# Altium PCB PCB_Left.pcbdoc
Units mil, origin at the board's own origin, x right, y up, seen from the top; angles counter-clockwise.
Board outline 5330 x 4850 mil, 2 copper layers (Top Layer, Bottom Layer), stack 62.206 mil thick; 7 components, 9 nets, 31 pads, 4 vias.
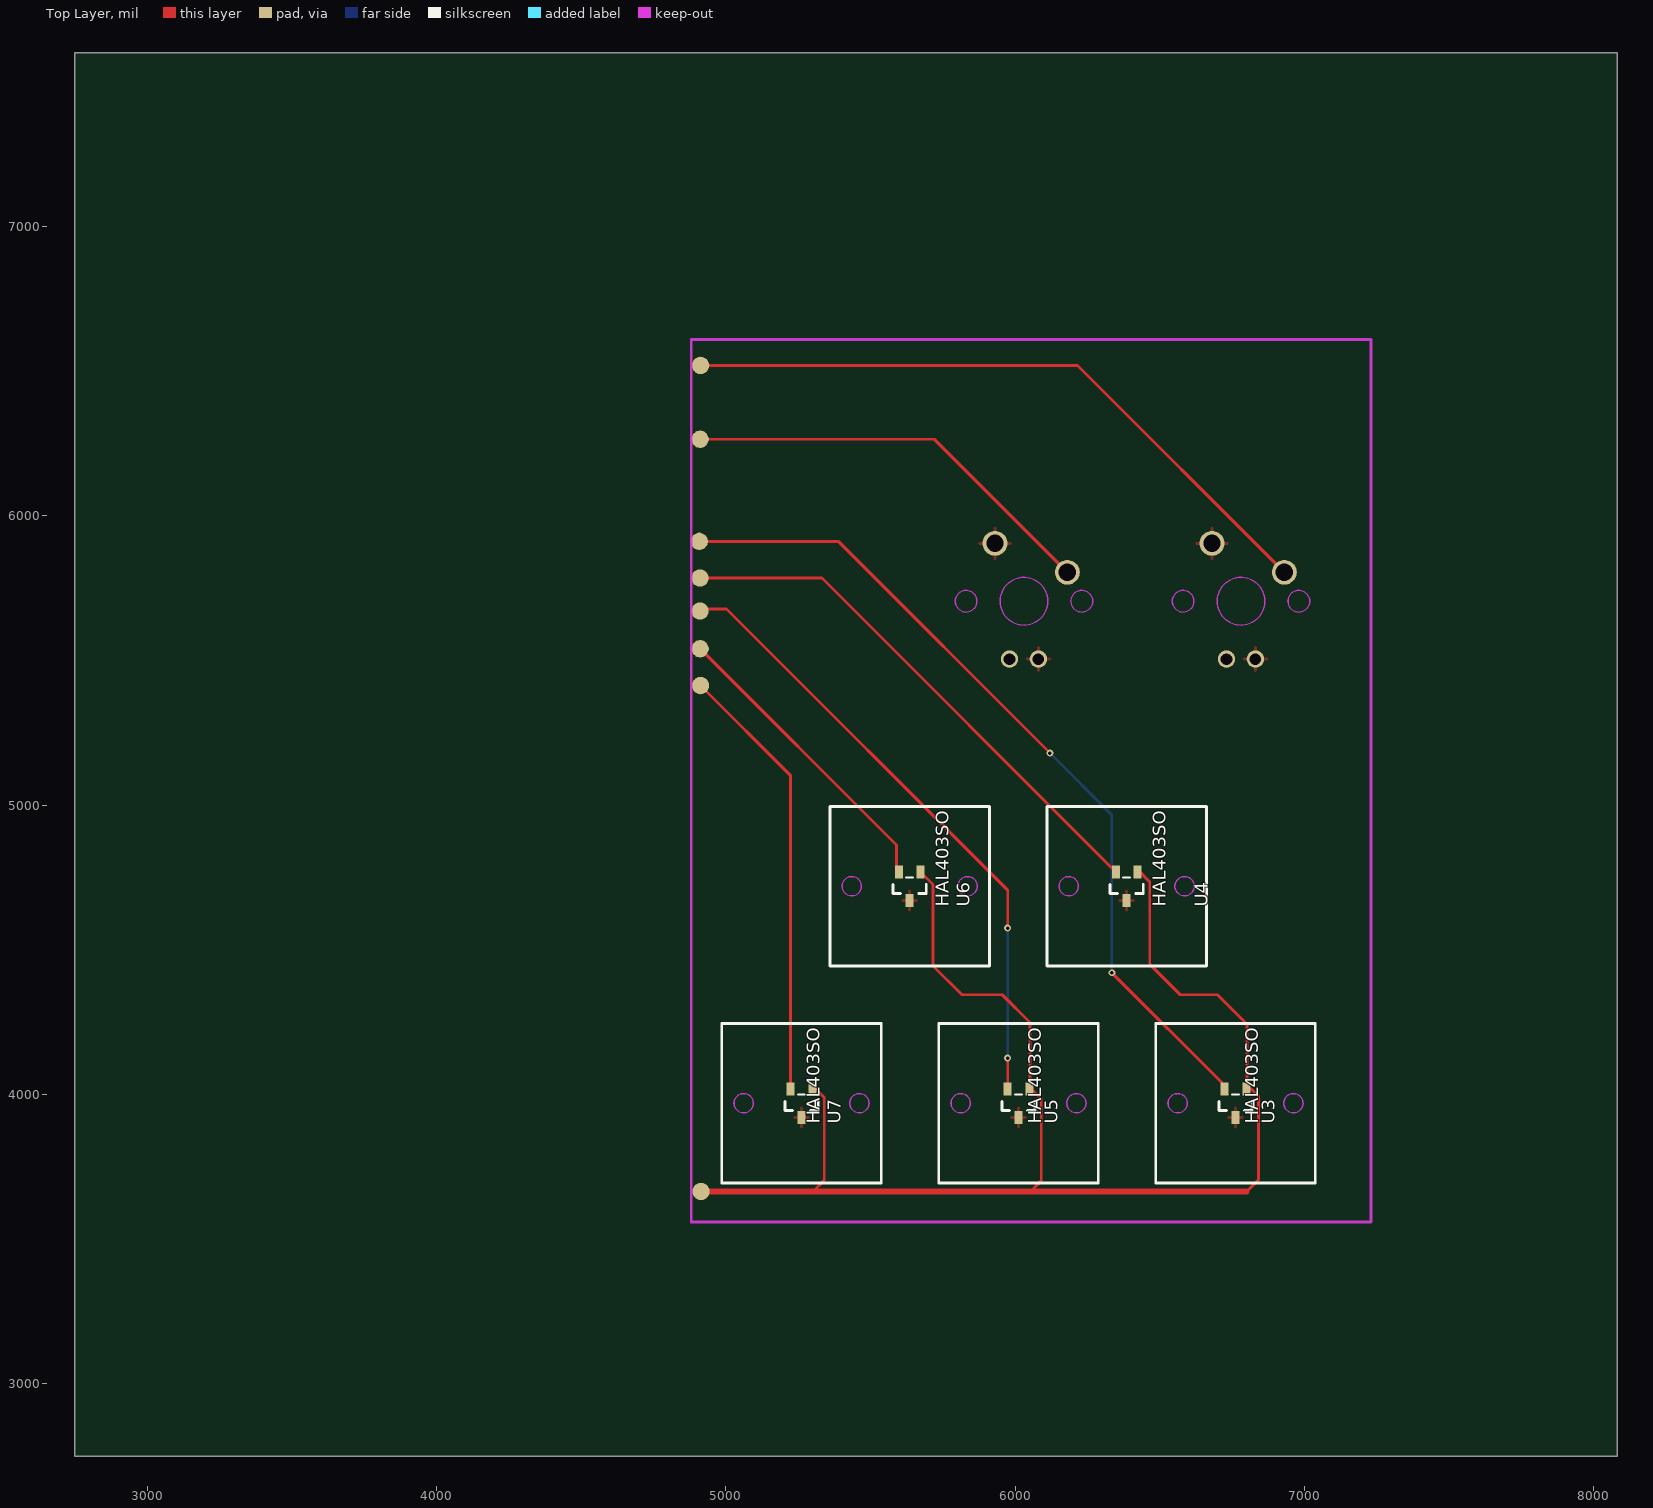
[diagram p0: Top Layer view]
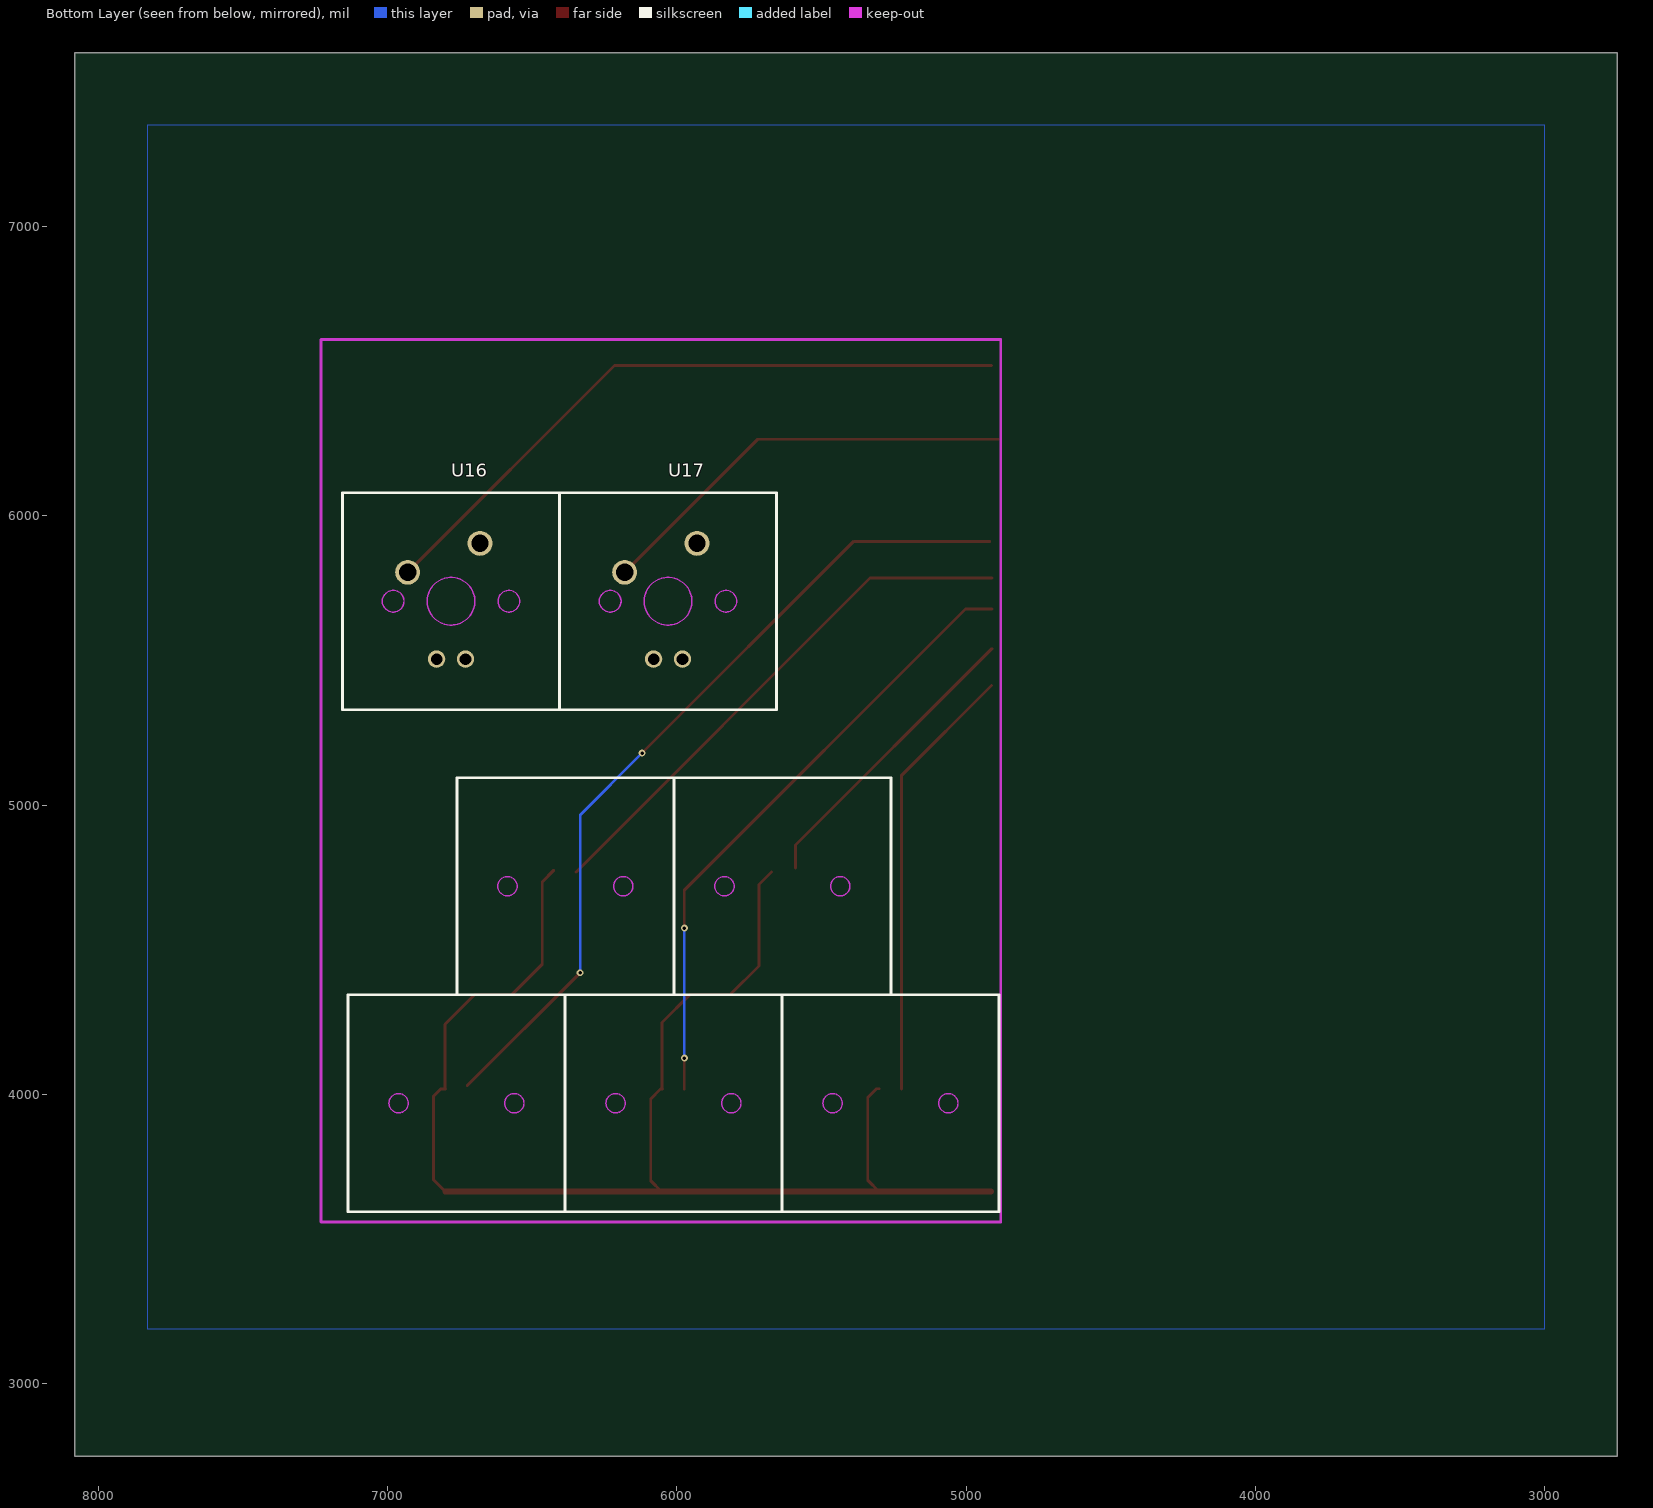
[diagram p1: Bottom Layer view, seen from below]

## Layer stack, top to bottom
Top Solder Mask Layer: solder mask 0.394, Dk 3.3
Top Layer: signal copper 1.379
Dielectric1: surface 59.449, FR4, Dk 4.5
Bottom Layer: signal copper 1.378
Bottom Solder Mask Layer: solder mask 0.394, Dk 3.3

## Board outline
8080,2750 2750,2750 2750,7600 8080,7600

## Design rules (kind name [scope] priority, off if disabled: settings)
BoardOutlineClearance copperThickness1oz [All] p0: genericclearance=10 ignorepadtopadclearanceinfootprint=FALSE except(0: Arc-SplitContinuation Track-SplitContinuation SMDPad-SplitContinuation THPad-SplitContinuation Via-SplitContinuation Fill-SplitContinuation Poly-SplitContinuation Region-SplitContinuation Text-SplitContinuation)
BoardOutlineClearance copperThickness2oz [All] p0: genericclearance=10 ignorepadtopadclearanceinfootprint=FALSE except(0: Arc-SplitContinuation Track-SplitContinuation SMDPad-SplitContinuation THPad-SplitContinuation Via-SplitContinuation Fill-SplitContinuation Poly-SplitContinuation Region-SplitContinuation Text-SplitContinuation)
BoardOutlineClearance otherClearance [All] p0: genericclearance=10 ignorepadtopadclearanceinfootprint=FALSE except(0: Arc-SplitContinuation Track-SplitContinuation SMDPad-SplitContinuation THPad-SplitContinuation Via-SplitContinuation Fill-SplitContinuation Poly-SplitContinuation Region-SplitContinuation Text-SplitContinuation)
Clearance copperThickness1oz [All] p1: gap=7 ignorepadtopadclearanceinfootprint=FALSE
Clearance copperThickness2oz [All] p1: gap=7 ignorepadtopadclearanceinfootprint=FALSE
Clearance otherClearance [All] p1: gap=7 ignorepadtopadclearanceinfootprint=FALSE
DiffPairsRouting differentialPair [All] p1: maxuncoupledlength=10 minlimit=6 maxlimit=Infinity mostfreqgap=6 toplayer_minwidth=5 toplayer_prefwidth=10 toplayer_maxwidth=100 bottomlayer_minwidth=5 bottomlayer_prefwidth=10 bottomlayer_maxwidth=100
PasteMaskExpansion pasteMaskExpansion [All] p1: expansion=0
PlaneConnect innerPlane [All] p1: planeconnectstyle=Relief reliefexpansion=20 reliefentries=4 reliefconductorwidth=10 reliefairgap=10
PolygonConnect copperRegion [All] p1: connectstyle=Relief reliefentries=4 reliefconductorwidth=10 polygonreliefangle="90 Angle" airgapwidth=10
RoutingVias viaSize [All] p1: viastyle="Through Hole" holewidth=12.0078 minholewidth=11.811 maxholewidth=248.0314 width=12.0078 minwidth=11.811 maxwidth=248.0314
SolderMaskExpansion solderMaskExpansion [All] p1: useseparateexpansions=TRUE expansion=2 expansionbottom=2
Width copperThickness1oz [All] p1: maxlimit=100 minlimit=5 preferedwidth=10
Width copperThickness2oz [All] p1: maxlimit=100 minlimit=8 preferedwidth=10

## Components (designator, comment, footprint, x,y, rotation, side; value= is the part's Value field where it differs from the comment)
U3 "HAL403SO" SOT-23-3_L2.9-W1.3-P1.90-LS2.4-BR-CW 6761.26,3970 r90 top
U4 "HAL403SO" SOT-23-3_L2.9-W1.3-P1.90-LS2.4-BR-CW 6385,4720 r90 top
U5 "HAL403SO" SOT-23-3_L2.9-W1.3-P1.90-LS2.4-BR-CW 6011.26,3970 r90 top
U6 "HAL403SO" SOT-23-3_L2.9-W1.3-P1.90-LS2.4-BR-CW 5635,4720 r90 top
U7 "HAL403SO" SOT-23-3_L2.9-W1.3-P1.90-LS2.4-BR-CW 5261.26,3970 r90 top
U16 "MX-1U" ? 6780,5705 r180 bottom
U17 "MX-1U" ? 6030,5705 r180 bottom

## Footprints (in the part's own frame and the unit in brackets; to place one, negate y for a bottom-side part, rotate by r counter-clockwise, add the part's x,y. Pads: shape width x height; smd on the part's side, far side on the other; paste and mask are expansions set on the pad)
SOT-23-3_L2.9-W1.3-P1.90-LS2.4-BR-CW [mm]
  rect 1.15x0.7 smd: 1(1.25,-0.95) 2(-1.25,0) 3(1.25,0.95)
  silkscreen extent -0.65,-1.46 0.76,1.46
? [mil]
  round 86 hole 60: COL(-150,100) ROW(100,200)
  round 60 hole 40: LED(-50,-200) LEDGND(50,-200)
  Board Outline Layer circle w0.1: c0,0 r82.5
  Board Outline Layer circle w0.1: c200,0 r37.5
  Board Outline Layer circle w0.1: c-200,0 r37.5
  Board Outline Layer region: -82.5,0 -74.33,-35.8 -51.44,-64.5 -18.36,-80.43 18.36,-80.43 51.44,-64.5 74.33,-35.8 82.5,0 82.5,0 74.33,35.8 51.44,64.5 18.36,80.43 -18.36,80.43 -51.44,64.5 -74.33,35.8 -82.5,0
  Board Outline Layer region: -82.5,0 -74.33,-35.8 -51.44,-64.5 -18.36,-80.43 18.36,-80.43 51.44,-64.5 74.33,-35.8 82.5,0 82.5,0 74.33,35.8 51.44,64.5 18.36,80.43 -18.36,80.43 -51.44,64.5 -74.33,35.8 -82.5,0
  Board Outline Layer region: 162.5,0 166.21,-16.27 176.62,-29.32 191.66,-36.56 208.34,-36.56 223.38,-29.32 233.79,-16.27 237.5,0 237.5,0 233.79,16.27 223.38,29.32 208.34,36.56 191.66,36.56 176.62,29.32 166.21,16.27 162.5,0
  Board Outline Layer region: 162.5,0 166.21,-16.27 176.62,-29.32 191.66,-36.56 208.34,-36.56 223.38,-29.32 233.79,-16.27 237.5,0 237.5,0 233.79,16.27 223.38,29.32 208.34,36.56 191.66,36.56 176.62,29.32 166.21,16.27 162.5,0
  Board Outline Layer region: -237.5,0 -233.79,-16.27 -223.38,-29.32 -208.34,-36.56 -191.66,-36.56 -176.62,-29.32 -166.21,-16.27 -162.5,0 -162.5,0 -166.21,16.27 -176.62,29.32 -191.66,36.56 -208.34,36.56 -223.38,29.32 -233.79,16.27 -237.5,0
  Board Outline Layer region: -237.5,0 -233.79,-16.27 -223.38,-29.32 -208.34,-36.56 -191.66,-36.56 -176.62,-29.32 -166.21,-16.27 -162.5,0 -162.5,0 -166.21,16.27 -176.62,29.32 -191.66,36.56 -208.34,36.56 -223.38,29.32 -233.79,16.27 -237.5,0

## Free pads (board coordinates)
  round 60 smd: 1(4910.96,6264.75) 1(4912.58,6520) 1(4913.74,3665) 2(4907.81,5912) 3(4910,5785) 6(4910.36,5670.97) 8(4910.99,5540.69) 10(4912.26,5413.42)

## Via types
v1: diameter 24.02, hole 12.01, Top Layer to Bottom Layer, 4 vias

## Nets (pads, with @x,y where several pads share a name; then routed paths per layer and width w, separated by ;. In a path a pad name is that pad's centre, name@x,y a point inside that pad or via, vN(x,y) a via of type N, cw(c..) or ccw(c..) an arc to the next point about the centre after c; other vN are vias at no path point)
3.3V: pad.1@4913.74,3665 U3.1 U4.1 U5.1 U6.1 U7.1 | length 6919.4
  Top Layer w0.5: pad.1@4913.74,3665 6800.3,3665
  Top Layer w10: U7.1@5300,4020 5310,4020 5340,3990 5340,3703.59 5301.41,3665 ; U6.1 5716.05,4725.55 5716.05,4444.41 5815.46,4345 5955,4345 6051.26,4248.74 U5.1@6051.26,4025 ; U5.1 6055.8,4019.2 6090,3985 6090,3701.82 6053.18,3665 ; U4.1@6425,4775 6465,4735 6465,4450 6570,4345 6698.97,4345 6801.26,4242.71 U3.1@6801.26,4025 ; U3.1 6815.8,4019.2 6840,3995 6840,3704.7 6800.3,3665
  Top Layer w19.7: pad.1@4913.74,3665 6800.3,3665
$1N130: pad.1@4912.58,6520 U16.COL | length 2313.6
  Top Layer w10: pad.1@4912.58,6520 6215,6520 U16.COL
$1N131: pad.1@4910.96,6264.75 U17.COL | length 1481.4
  Top Layer w10: pad.1@4889.02,6264.75 5720.25,6264.75 U17.COL
C: pad.2 U3.3 | length 2904.5
  Top Layer w10: pad.2@4918.14,5912 5388,5912 v1(6120,5180) ; v1(6333.64,4420.92) U3.3@6723.86,4030.7
  Bottom Layer w10: v1(6120,5180) 6333.64,4966.36 v1(6333.64,4420.92)
C#: pad.3 U4.3 | length 1858.4
  Top Layer w10: pad.3 5331.8,5785 U4.3
D: pad.6 U5.3 | length 2153.2
  Top Layer w10: pad.6@4910.36,5678.44 5001.56,5678.44 5973.86,4706.14 v1(5973.86,4575) ; U5.3 v1(5973.86,4125.6)
  Bottom Layer w10: v1(5973.86,4125.6) v1(5973.86,4575)
D#: pad.8 U6.3 | length 1038.5
  Top Layer w10: pad.8 5589.53,4862.16 U6.3@5589.53,4783.26
E: pad.10 U7.3 | length 1523.3
  Top Layer w10: pad.10 5223.86,5101.82 U7.3
GND: U3.2 U4.2 U5.2 U6.2 U7.2 U16.LED U16.ROW U17.LED U17.ROW
pads on no net: U16.LEDGND U17.LEDGND

## Polygon pours and split planes (outlines as drawn)
GND on Top Layer (solid, remove dead copper, pour order 0): 4645,6965 7670,6965 7670,3000 4645,3000
GND on Bottom Layer (solid, remove dead copper, pour order 2): 3000,7350 7830,7350 7830,3190 3000,3190

## Keep-outs
Board Outline Layer:
  region: 5094.72,3970 cw(c5061.26,3970) 5027.8,3970 cw(c5061.26,3970)
  circle w0.1: c5061.26,3970 r33.46
  region: 5094.72,3970 cw(c5061.26,3970) 5027.8,3970 cw(c5061.26,3970)
  region: 5468.46,4720 cw(c5435,4720) 5401.54,4720 cw(c5435,4720)
  circle w0.1: c5435,4720 r33.46
  region: 5468.46,4720 cw(c5435,4720) 5401.54,4720 cw(c5435,4720)
  region: 5494.72,3970 cw(c5461.26,3970) 5427.8,3970 cw(c5461.26,3970)
  circle w0.1: c5461.26,3970 r33.46
  region: 5494.72,3970 cw(c5461.26,3970) 5427.8,3970 cw(c5461.26,3970)
  region: 5844.72,3970 cw(c5811.26,3970) 5777.8,3970 cw(c5811.26,3970)
  circle w0.1: c5811.26,3970 r33.46
  region: 5844.72,3970 cw(c5811.26,3970) 5777.8,3970 cw(c5811.26,3970)
  region: 5868.46,4720 cw(c5835,4720) 5801.54,4720 cw(c5835,4720)
  circle w0.1: c5835,4720 r33.46
  region: 5868.46,4720 cw(c5835,4720) 5801.54,4720 cw(c5835,4720)
  region: 6218.46,4720 cw(c6185,4720) 6151.54,4720 cw(c6185,4720)
  circle w0.1: c6185,4720 r33.46
  region: 6218.46,4720 cw(c6185,4720) 6151.54,4720 cw(c6185,4720)
  region: 6244.72,3970 cw(c6211.26,3970) 6177.8,3970 cw(c6211.26,3970)
  circle w0.1: c6211.26,3970 r33.46
  region: 6244.72,3970 cw(c6211.26,3970) 6177.8,3970 cw(c6211.26,3970)
  region: 6594.72,3970 cw(c6561.26,3970) 6527.8,3970 cw(c6561.26,3970)
  circle w0.1: c6561.26,3970 r33.46
  region: 6594.72,3970 cw(c6561.26,3970) 6527.8,3970 cw(c6561.26,3970)
  region: 6618.46,4720 cw(c6585,4720) 6551.54,4720 cw(c6585,4720)
  circle w0.1: c6585,4720 r33.46
  region: 6618.46,4720 cw(c6585,4720) 6551.54,4720 cw(c6585,4720)
  region: 6994.72,3970 cw(c6961.26,3970) 6927.8,3970 cw(c6961.26,3970)
  circle w0.1: c6961.26,3970 r33.46
  region: 6994.72,3970 cw(c6961.26,3970) 6927.8,3970 cw(c6961.26,3970)
  lines w10: 4880,3560 7230,3560 7230,6610 4880,6610 4880,3560

## Silkscreen, mask and mechanical layers (free items; w line width, h text height)
Top Silkscreen Layer:
  lines w10: 4985.67,3694.41 4985.67,4245.59 5536.85,4245.59 5536.85,3694.41 4985.67,3694.41 ; 5359.41,4444.41 5359.41,4995.59 5910.59,4995.59 5910.59,4444.41 5359.41,4444.41 ; 5735.67,3694.41 5735.67,4245.59 6286.85,4245.59 6286.85,3694.41 5735.67,3694.41 ; 6109.41,4444.41 6109.41,4995.59 6660.59,4995.59 6660.59,4444.41 6109.41,4444.41 ; 6485.67,3694.41 6485.67,4245.59 7036.85,4245.59 7036.85,3694.41 6485.67,3694.41
Bottom Silkscreen Layer:
  lines w10: 5636.26,3595 5636.26,4345 ; 5636.26,3595 4886.26,3595 4886.26,4345 5636.26,4345 ; 5636.26,3595 5636.26,4345 ; 5636.26,3595 6386.26,3595 ; 5636.26,4345 6386.26,4345 ; 6010,4345 6010,5095 ; 6010,4345 5260,4345 5260,5095 6010,5095 ; 6010,4345 6010,5095 ; 6010,4345 6760,4345 6760,5095 6010,5095 ; 6386.26,3595 6386.26,4345 ; 6386.26,3595 6386.26,4345 ; 6386.26,3595 7136.26,3595 7136.26,4345 6386.26,4345 ; 6405,5330 6405,6080 ; 6405,5330 5655,5330 5655,6080 6405,6080 ; 6405,5330 7155,5330 7155,6080 6405,6080 ; 6405,5330 6405,6080
Mechanical Layer:
  circle w0.1: c5061.26,3970 r33.46
  circle w0.1: c5435,4720 r33.46
  circle w0.1: c5461.26,3970 r33.46
  circle w0.1: c5811.26,3970 r33.46
  circle w0.1: c5835,4720 r33.46
  circle w0.1: c6185,4720 r33.46
  circle w0.1: c6211.26,3970 r33.46
  circle w0.1: c6561.26,3970 r33.46
  circle w0.1: c6585,4720 r33.46
  circle w0.1: c6961.26,3970 r33.46

## Text inside footprints (layer, text, board x,y; h text height)
U16: Document Layer "1U" at 6540,5435 h40
U17: Document Layer "1U" at 5790,5435 h40